# Altium PCB Touchscreen.PcbDoc
Units mm, origin at the board's own origin, x right, y up, seen from the top; angles counter-clockwise.
Board outline 54.5 x 72.5 mm, 2 copper layers (Top Layer, Bottom Layer); 1 components, 0 nets, 40 pads, 0 vias.
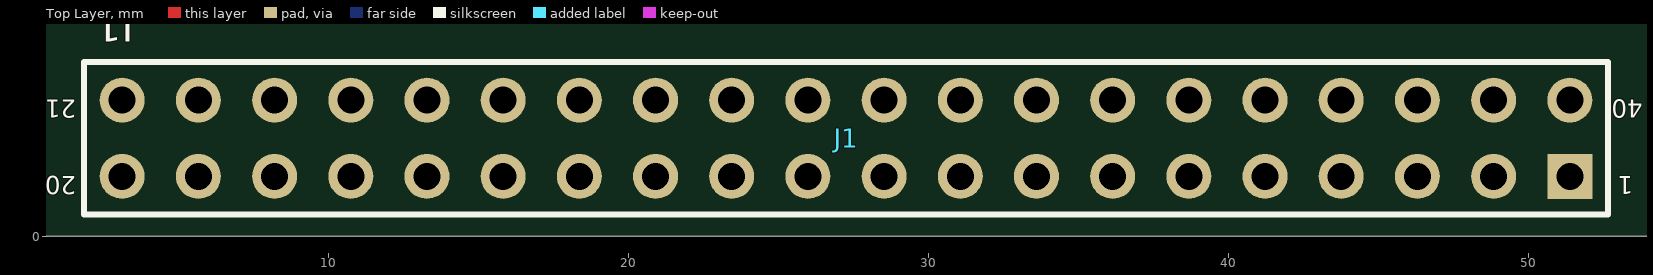
[diagram p0: Top Layer view]
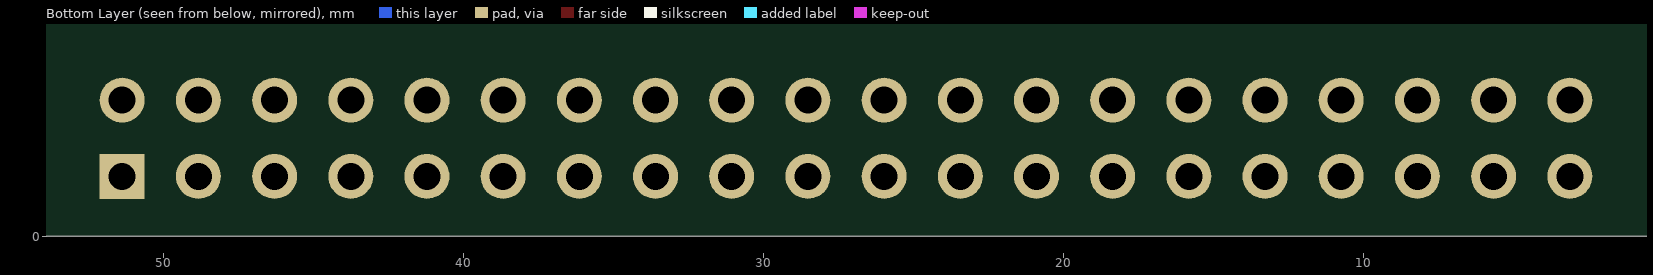
[diagram p1: Bottom Layer view, seen from below]

## Layer stack, top to bottom
Top Solder: solder mask 0.0102, Solder Resist, Dk 3.5
Top Layer: signal copper 0.0356
Dielectric 1: dielectric 0.32, FR-4, Dk 4.8
Bottom Layer: signal copper 0.0356
Bottom Solder: solder mask 0.0102, Solder Resist, Dk 3.5

## Board outline
0,0 54.5,0 54.5,72.5 0,72.5

## Design rules (kind name [scope] priority, off if disabled: settings)
Clearance [All] p1: gap=0.254
PolygonConnect [All] p1: connectstyle=Relief reliefconductorwidth=0.254 reliefentries=4 polygonreliefangle="90 Angle" airgapwidth=0.254
RoutingVias [All] p1: holewidth=0.711 width=1.27 viastyle="Through Hole" minholewidth=0.711 minwidth=1.27 maxholewidth=0.711 maxwidth=1.27
SolderMaskExpansion [All] p1: expansion=0.102
UnpouredPolygon [All] p1: allowunpoured=FALSE
Width [All] p1: maxlimit=0.254 minlimit=0.254 preferedwidth=0.254
29 further rules are at their usual default settings.

## Components (designator, comment, footprint, x,y, rotation, side; value= is the part's Value field where it differs from the comment)
J1 "TScreen Header" TSCREEN_PINS 27.25,3.27 r90 top

## Footprints (in the part's own frame and the unit in brackets; to place one, negate y for a bottom-side part, rotate by r counter-clockwise, add the part's x,y. Pads: shape width x height; smd on the part's side, far side on the other; paste and mask are expansions set on the pad)
TSCREEN_PINS [mm]
  rect 1.5x1.5 hole 0.9: 1(-1.27,-24.13)
  round 1.5 hole 0.9: 2(-1.27,-21.59) 3(-1.27,-19.05) 4(-1.27,-16.51) 5(-1.27,-13.97) 6(-1.27,-11.43) 7(-1.27,-8.89) 8(-1.27,-6.35) 9(-1.27,-3.81) 10(-1.27,-1.27) 11(-1.27,1.27) 12(-1.27,3.81) 13(-1.27,6.35) 14(-1.27,8.89) 15(-1.27,11.43) 16(-1.27,13.97) 17(-1.27,16.51) 18(-1.27,19.05) 19(-1.27,21.59) 20(-1.27,24.13) 21(1.27,24.13) 22(1.27,21.59) 23(1.27,19.05) 24(1.27,16.51) 25(1.27,13.97) 26(1.27,11.43) 27(1.27,8.89) 28(1.27,6.35) 29(1.27,3.81) 30(1.27,1.27) 31(1.27,-1.27) 32(1.27,-3.81) 33(1.27,-6.35) 34(1.27,-8.89) 35(1.27,-11.43) 36(1.27,-13.97) 37(1.27,-16.51) 38(1.27,-19.05) 39(1.27,-21.59) 40(1.27,-24.13)
  silkscreen extent -2.54,-25.4 2.54,25.4, body extent -2.54,-25.4 2.54,25.4, height 1.4

## Part data
J1: library part DISPLAY

## Nets (pads, with @x,y where several pads share a name; then routed paths per layer and width w, separated by ;. In a path a pad name is that pad's centre, name@x,y a point inside that pad or via, vN(x,y) a via of type N, cw(c..) or ccw(c..) an arc to the next point about the centre after c; other vN are vias at no path point)
pads on no net: J1.1 J1.2 J1.3 J1.4 J1.5 J1.6 J1.7 J1.8 J1.9 J1.10 J1.11 J1.12 J1.13 J1.14 J1.15 J1.16 J1.17 J1.18 J1.19 J1.20 J1.21 J1.22 J1.23 J1.24 J1.25 J1.26 J1.27 J1.28 J1.29 J1.30 J1.31 J1.32 J1.33 J1.34 J1.35 J1.36 J1.37 J1.38 J1.39 J1.40

## Silkscreen, mask and mechanical layers (free items; w line width, h text height)
Mechanical 1:
  the board outline again, w0.25

## Text inside footprints (layer, text, board x,y; h text height)
J1: Top Overlay "40" at 53.809,4.548 h0.6 r180; Top Overlay "1" at 53.5,2 h0.6 r180; Top Overlay "20" at 1.588,2.008 h0.6 r180; Top Overlay "21" at 1.588,4.548 h0.6 r180